# Altium PCB PCB1.PcbDoc
Units mm, origin at the board's own origin, x right, y up, seen from the top; angles counter-clockwise.
Board outline 102.49 x 44.58 mm, 2 copper layers (Top Layer, Bottom Layer); 31 components, 40 nets, 125 pads, 4 vias.
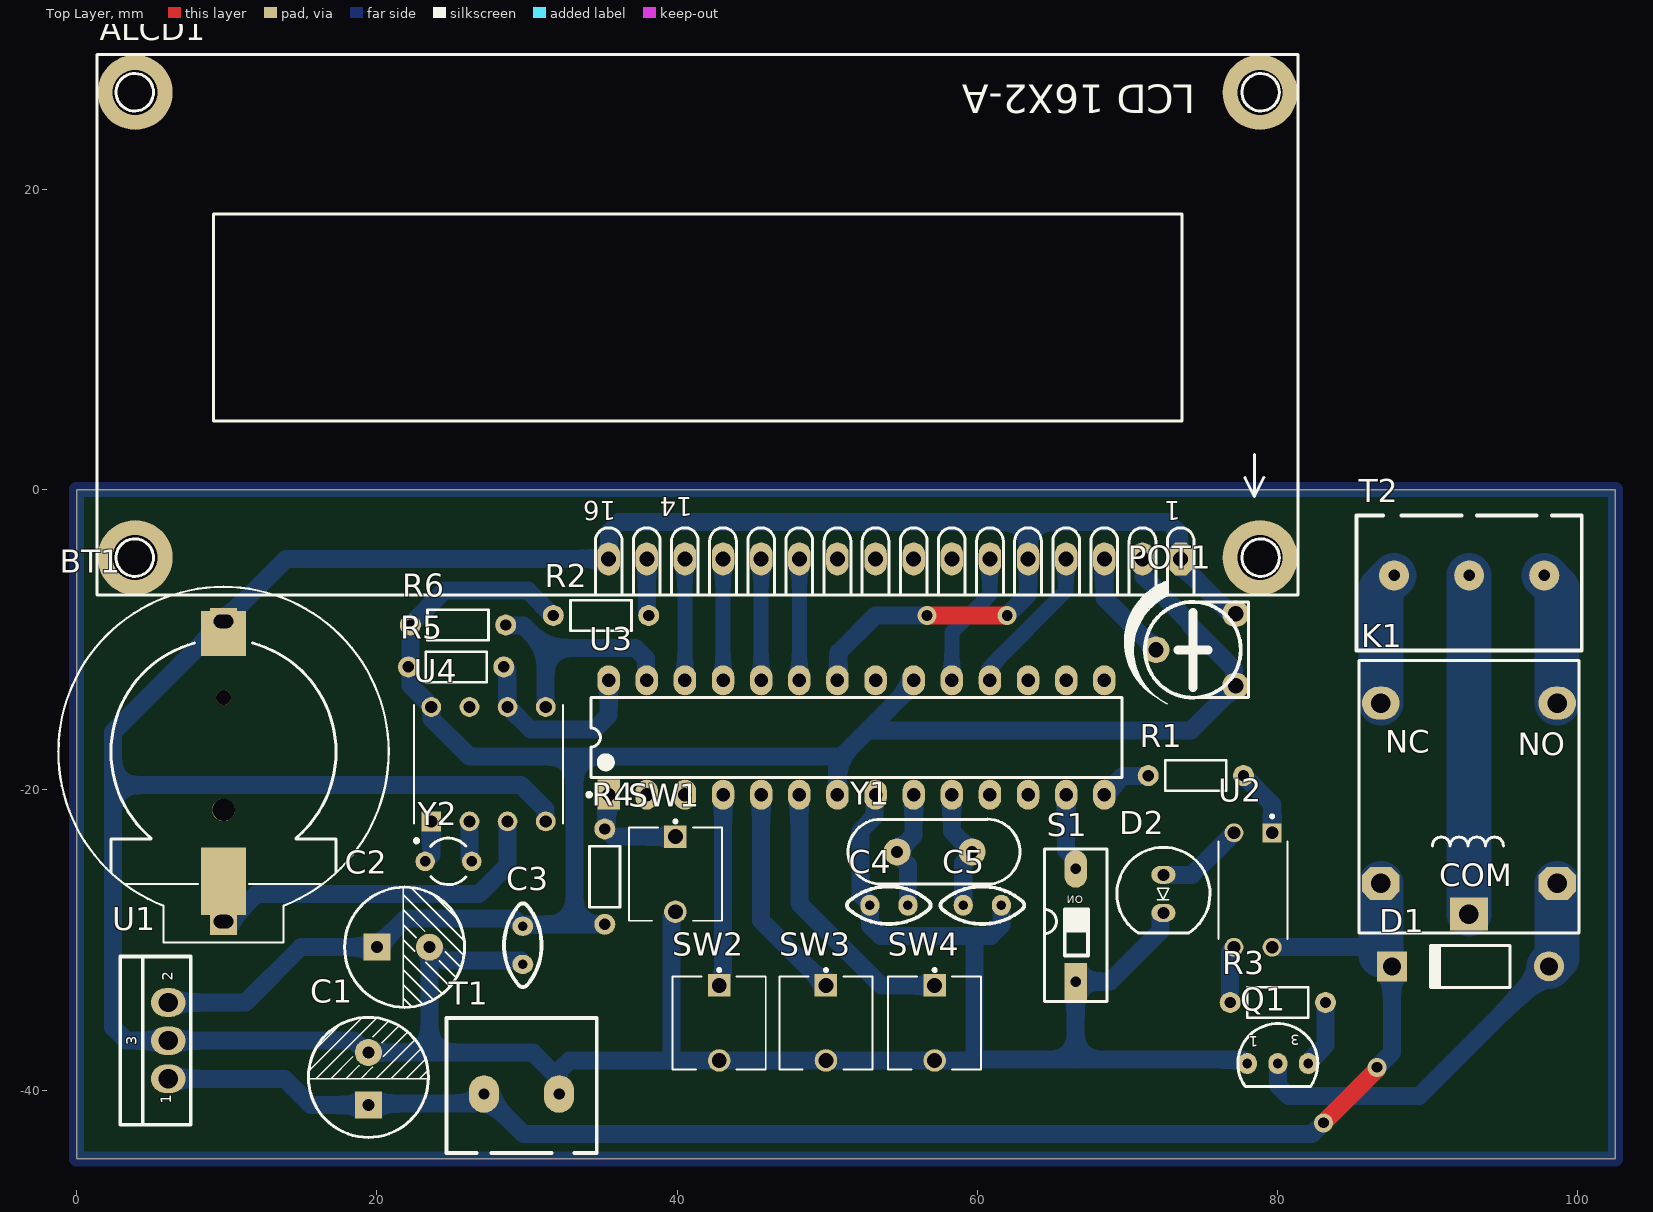
[diagram p0: Top Layer view]
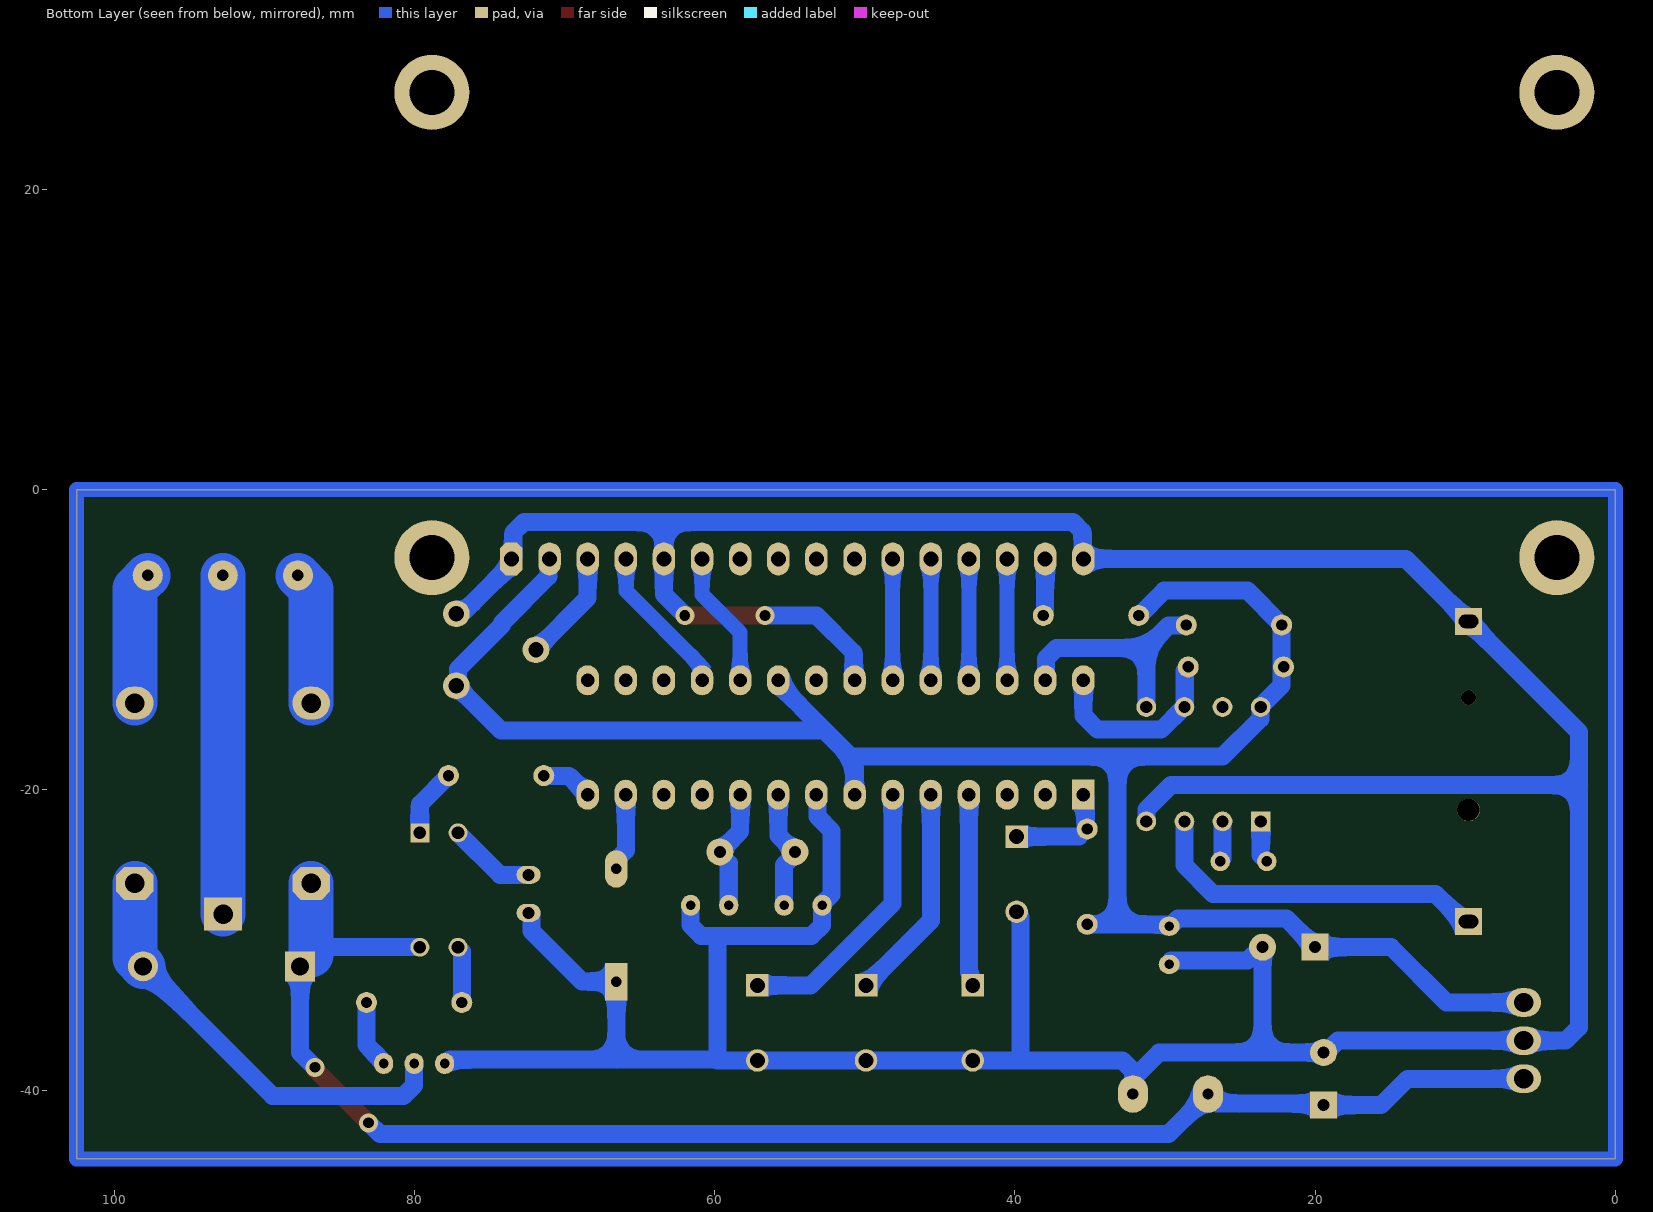
[diagram p1: Bottom Layer view, seen from below]
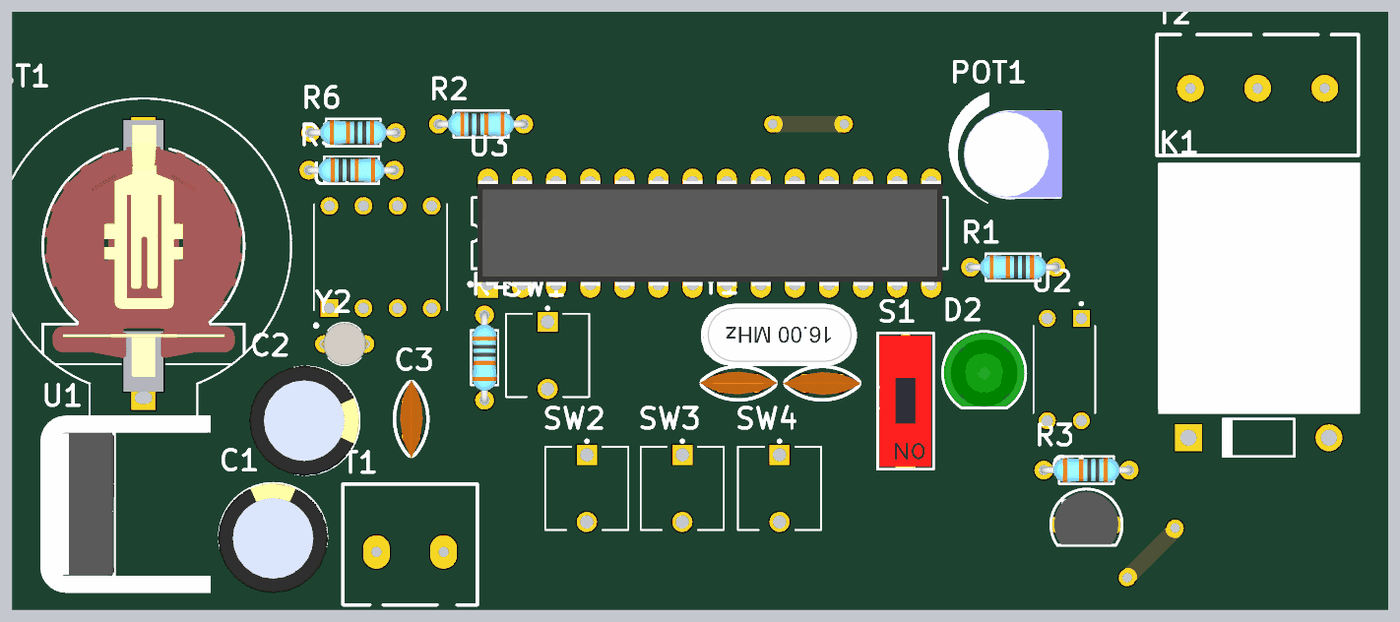
[diagram p2: 3D render of the assembled board from above, using the file's embedded part models]

## Layer stack, top to bottom
Top Solder: solder mask 0.0102, Solder Resist, Dk 3.5
Top Layer: signal copper 0.0356
Dielectric 1: dielectric 0.32, FR-4, Dk 4.8
Bottom Layer: signal copper 0.0356
Bottom Solder: solder mask 0.0102, Solder Resist, Dk 3.5

## Board outline
0,-44.577 0,0 102.489,0 102.489,-44.577

## Design rules (kind name [scope] priority, off if disabled: settings)
Clearance [All] p1: gap=0.254 ignorepadtopadclearanceinfootprint=FALSE except(0: Arc-Hole Track-Hole SMDPad-Hole THPad-Hole Via-Hole Fill-Hole Poly-Hole Region-Hole Text-Hole)
PolygonConnect [All] p1: connectstyle=Relief reliefconductorwidth=0.254 reliefentries=4 polygonreliefangle="90 Angle" airgapwidth=0.254
RoutingVias [All] p1: holewidth=0.711 width=1.27 viastyle="Through Hole" minholewidth=0.711 minwidth=1.27 maxholewidth=0.711 maxwidth=1.27
SolderMaskExpansion [All] p1: expansion=0.102 istentingtop=FALSE
Width [All] p1: maxlimit=3 minlimit=1 preferedwidth=1.2
30 further rules are at their usual default settings.

## Classes and differential pairs
component class Sheet1: ALCD1 BT1 C1 C2 C3 C4 C5 D1 D2 K1 POT1 Q1 R1 R2 R3 R4 S1 SW1 SW2 SW3 SW4 T1 T2 U1 U2 U3 U4 Y1 Y2

## Components (designator, comment, footprint, x,y, rotation, side; value= is the part's Value field where it differs from the comment)
ALCD1 "LCD" LCD_2X16 44.069,11.684 r180 top
BT1 "BAT3V3" BTH1220 9.779,-18.773 r90 top
C1 "100uf" "Cap electrolitic radial 8x14-3.5" 19.431,-39.243 r90 top value=1uF
C2 "100uf" "Cap electrolitic radial 8x14-3.5" 21.745,-30.48 r0 top value=1uF
C3 "100nF" Cap-100nF 29.718,-30.353 r90 top
C4 "22pf" Cap-100nF 54.102,-27.686 r180 top
C5 "22pf" Cap-100nF 60.325,-27.686 r0 top
D1 "Diode 1N4007" DO-41 92.837,-31.75 r180 top
D2 "LED 5MM" LED5MM_GRN 72.39,-26.924 r270 top
K1 "" "Relay 18.85x15.35x15.70" 92.743,-21.249 r0 top
POT1 "10K" "POT 4" 74.549,-10.668 r90 top
Q1 "C945" C945 80.01,-38.227 r180 top
R1 "1K" RES-(1/4) 74.549,-19.05 r180 top
R2 "220" RES-(1/4) 34.925,-8.382 r0 top
R3 "2.2K" RES-(1/4) 80.01,-34.163 r180 top
R4 "10K" RES-(1/4) 35.179,-25.781 r270 top
R5 "10K" RES-(1/4) 25.273,-11.811 r0 top
R6 "10K" RES-(1/4) 25.4,-9.017 r180 top
S1 "DS1" "DIP Switch x1" 66.548,-32.766 r0 top
SW1 "FSM8JRT" TE_FSM8JRT 39.878,-23.114 r270 top
SW2 "down" TE_FSM8JRT 42.799,-33.02 r270 top
SW3 "set" TE_FSM8JRT 49.911,-33.02 r270 top
SW4 "up" TE_FSM8JRT 57.15,-33.02 r270 top
T1 "Terminal" "Terminal 1*2" 24.638,-44.196 r0 top
T2 "Terminal" "Terminal 1*3" 100.257,-1.715 r180 top
U1 "L7805CV" 78XXCV 6.096,-36.703 r90 top
U2 "PC817X3NSZ1B" DIP762W50P254L495H455Q4 78.359,-26.67 r270 top
U3 "ATmega328A-PU" 28P3 51.943,-16.51 r90 top
U4 "DS1307N" DIP762W47P254L991H457Q8 27.432,-18.288 r90 top
Y1 "16 MHz" "XTAL 16MHZ" 57.15,-24.13 r180 top value="12 MHz"
Y2 "32.768KHz" "XTAL RTC" 24.765,-24.765 r180 top value="12 MHz"

## Footprints (in the part's own frame and the unit in brackets; to place one, negate y for a bottom-side part, rotate by r counter-clockwise, add the part's x,y. Pads: shape width x height; smd on the part's side, far side on the other; paste and mask are expansions set on the pad)
28P3 [mm] "DIP, 28-Leads, Row Spacing 7.62mm, Pitch 2.54mm, Body 34.67x7.3mm"
  rect 2x1.5 hole 0.9: 1(-3.81,16.51)
  oval 2x1.5 hole 0.9: 2(-3.81,13.97) 3(-3.81,11.43) 4(-3.81,8.89) 5(-3.81,6.35) 6(-3.81,3.81) 7(-3.81,1.27) 8(-3.81,-1.27) 9(-3.81,-3.81) 10(-3.81,-6.35) 11(-3.81,-8.89) 12(-3.81,-11.43) 13(-3.81,-13.97) 14(-3.81,-16.51) 15(3.81,-16.51) 16(3.81,-13.97) 17(3.81,-11.43) 18(3.81,-8.89) 19(3.81,-6.35) 20(3.81,-3.81) 21(3.81,-1.27) 22(3.81,1.27) 23(3.81,3.81) 24(3.81,6.35) 25(3.81,8.89) 26(3.81,11.43) 27(3.81,13.97) 28(3.81,16.51)
  silkscreen extent -3.93,-17.7 2.65,17.93, body extent -3.95,-17.35 3.95,17.3, height 5.04
78XXCV [mil]
  oval 75x90 hole 50: 1(-100,0) 2(100,0) 3(0,0)
  silkscreen extent -221,-59 221,126, body extent -260,-343 260,157, height 890
BTH1220 [mm] "COIN CELL BATTERY HOLDER 1220 12mm CR1220"
  round 1.5 hole 1.5 unplated: 0(-2.563,0)
  round 1 hole 1 unplated: 0(4.93,0)
  rect 1.8x1.8 hole 0.9 slot 1.3 at 90 deg: 1(-10,0) 2(10,0)
  rect 4.5x3 smd: 1(-7.3,0)
  rect 3x3 smd: 2(9.2,0)
  silkscreen extent -11.4,-11 12.3,11, body extent -8.46,-7.39 10.34,7.36, height 4.28
C945 [mil] "NPN Transistor"
  oval 50x55 hole 25: 1(80,0) 2(0,0) 3(-80,0)
  silkscreen extent -105,-105 105,61, body extent -94,-96 95,58, height 315
"Cap electrolitic radial 8x14-3.5" [mm] "Cap electrolitic radial 8x14-3.5-Design:Abbas Basereh"
  rect 1.8x1.8 hole 0.8: 1(-1.75,0)
  round 1.8 hole 0.8: 2(1.75,0)
  silkscreen extent -3.9,-4 4.1,4, body extent -4.1,-4.1 4.1,4.1, height 14.6
Cap-100nF [mil] "Bipolar Capacitor-Design:Ali Hafizi"
  oval 50x55 hole 25: 1(-50,0) 2(50,0)
  silkscreen extent -110,-49 110,49, body extent -115,-34 115,33, height 272
DIP762W47P254L991H457Q8 [mm]
  rect 1.318x1.318 hole 0.81: 1(-3.81,3.81)
  round 1.318 hole 0.81: 2(-3.81,1.27) 3(-3.81,-1.27) 4(-3.81,-3.81) 5(3.81,-3.81) 6(3.81,-1.27) 7(3.81,1.27) 8(3.81,3.81)
  silkscreen extent -5.22,-4.96 3.94,4.96
DIP762W50P254L495H455Q4 [mm]
  rect 1.26x1.26 hole 0.84: 1(-3.81,1.27)
  round 1.26 hole 0.84: 2(-3.81,-1.27) 3(3.81,-1.27) 4(3.81,1.27)
  silkscreen extent -5.01,-2.3 3.25,2.3
"DIP Switch x1" [mm] "Switch DIP 1 way flat slide Thru-Hole-Design:Ali Hafizi"
  rect 1.5x2.5 hole 0.7: 1(0,0)
  oval 1.5x2.5 hole 0.7: 2(0,7.5)
  silkscreen extent -2.09,-1.32 2.08,8.82, body extent -1.94,-1.11 1.89,8.64, height 7.33
DO-41 [mm] "Diode, Axial; Body 5.2 x 2.7 mm (LxDia. max), Lead Dia. 0.86 mm (max)"
  round 2 hole 1.2: 1(-5.23,0)
  rect 2x2 hole 1.2: 2(5.23,0)
  silkscreen extent -2.65,-1.4 2.75,1.4
LCD_2X16 [mm] "LCD 2x16 Alphanumberic-Designer Abbas Basereh"
  oct 1.5x2.2 hole 1: 1(-29.464,16.3)
  oval 1.5x2.2 hole 1: 2(-26.924,16.3) 3(-24.384,16.3) 4(-21.844,16.3) 5(-19.304,16.3) 6(-16.764,16.3) 7(-14.224,16.3) 8(-11.684,16.3) 9(-9.144,16.3) 10(-6.604,16.3) 11(-4.064,16.3) 12(-1.524,16.3) 13(1.016,16.3) 14(3.556,16.3) 15(6.096,16.3) 16(8.636,16.3)
  round 5 hole 3: ""(-34.756,-14.775) ""(-34.756,16.213) ""(40.174,-14.775) ""(40.174,16.213)
  silkscreen extent -37.3,-17.29 42.7,18.71, body extent -37.35,-17.4 42.8,18.8, height 21
LED5MM_GRN [mm] "LED 5MM THROUGH HOLE GREEN-Designer Abbas Basereh"
  oval 1.2x1.6 hole 0.8: 1(-1.27,0) 2(1.27,0)
  silkscreen extent -3.1,-3.1 2.6,3.1, body extent -3,-3 2.5,3, height 9.14
"POT 4" [mil] "Trimmer"
  round 70 hole 40: 1(-94.49,-104.33) 2(94.49,-104.33) 3(0,104.33)
  silkscreen extent -141,-138 181,187, body extent -125,-144 127,145, height 187
"Relay 18.85x15.35x15.70" [mm]
  rect 2.5x2.2 hole 1.3: 1(0,-7.025)
  oval 2.5x2.2 hole 1.3: 2(-5.875,7.025) 3(5.875,7.025)
  oct 2.5x2.2 hole 1.3: 4(-5.875,-4.975) 5(5.875,-4.975)
  silkscreen extent -7.32,-8.27 7.32,9.87, body extent -7.37,-8.71 7.63,9.98, height 15.7
RES-(1/4) [mil]
  round 55 hole 30: 1(-125,0) 2(125,0)
  silkscreen extent -80,-40 80,40, body extent -135,-36 135,36, height 115
TE_FSM8JRT [mil]
  rect 59x59 hole 39: 1(0,0)
  round 59 hole 39: 2(197,0)
  silkscreen extent -44,-122 221,122
"Terminal 1*2" [mil]
  oval 78.74x98.43 hole 30: 1(98.15,155) 2(295,155)
  silkscreen extent 0,0 394,354
"Terminal 1*3" [mm]
  round 2 hole 0.762: 1(2.5,4) 2(7.5,4) 3(12.5,4)
  silkscreen extent 0,0 15,9
"XTAL 16MHZ" [mm] "Crystal Oscillator"
  round 1.8 hole 0.8: 1(-2.5,0) 2(2.5,0)
  silkscreen extent -5.67,-2.18 5.76,2.15, body extent -5.68,-2.38 5.67,2.27, height 0.99
"XTAL RTC" [mm] "Crystal Oscillator"
  round 1.3 hole 0.7: 1(-1.55,0) 2(1.55,0)
  silkscreen extent -1.17,-1.55 1.19,1.55, body extent -1.73,-1.6 1.72,1.6, height 8.98

## Part data
ALCD1: "Alphanumic LCD", Data=16-12-2016, Designer="Abbas Basereh"
BT1: library part "Battry Backup", "Battry Backup", Data=16-12-2016, Designer="Abbas Basereh"
C1 C2: library part "Cap ELECTROLITIC TOTAL SIZE", "Cap electrolitic radial", Data=16-12-2016, Designer="Abbas Basereh"
C3 C4 C5: library part "CAP CERAMIC TOTAL SIZE", "CAP Ceramic Total", Designer="Ali Hafizi"
D1: "1 Amp General Purpose Rectifier", Code_JEDEC=DO-204-AL, ComponentLink1Description="Manufacturer Link", ComponentLink1URL=http://www.fairchildsemi.com/, ComponentLink2Description=Datasheet, ComponentLink2URL=http://www.fairchildsemi.com/ds/1N%2F1N4001.pdf, DatasheetVersion=1998, LatestRevisionDate=17-Jul-2002, LatestRevisionNote="Re-released for DXP Platform.", PackageDescription="Diode, Axial; Body 5.2 x 2.7 mm (LxDia. max), Lead Dia. 0.86 mm (max)", PackageReference=DO-41, PackageVersion=Aug-1999, Published=8-Jun-2000, Publisher="Altium Limited"
D2: "Light Emitting Diode", Data=16-12-2016, Designer="Abbas Basereh"
K1: library part RELAY_SPDT, "Single-Pole Dual-Throw Relay", ComponentLink1Description=Datasheet, Designer="Abbas Basereh", Mounting Technology=Through-Hole, Pin Count=0, Update Date=2017-3-1
POT1: library part POT, "Variable Resistor"
Q1: "NPN Transistor", Company="IPA CO", Designer="Saeid Jorablo", Last Update Time=2008/08/04
R1 R2 R3 R4 R5 R6: library part "RES DIP PACKAGE", "TOTAL DIP RESISTOR PACK", Designer="Ali Hafizi"
S1: library part "DIP Switch 1", "1 BIT DIP Switch"
SW1: "Switch Tactile OFF _ON_ SPST Round Button PC Pins 0.05A 12VDC 1.57N Thru-Hole Radial Tape", Contact_Current_Rating="50 mA", Package=None, Availability=Unavailable, Configuration_Pole-Throw="Single Pole - Single Throw", EU_RoHS_Compliance=Compliant, MF="TE Connectivity", MP=FSM8JRT, Price=None, SnapEDA_Link=https://www.snapeda.com/parts/FSM8JRT/TE%20Connectivity%20ALCOSWITCH%20Switches/view-part/226999/?ref=snap, TE_purchase_URL=https://www.te.com/usa-en/product-147694-1.html?te_bu=Cor&te_type=disp&te_campaign=seda_glo_cor-seda-global-disp-prtnr-fy19-seda-model-bom-cta_sma-317_1&elqCampaignId=32493
SW2 SW3 SW4: library part FSM8JRT, "Switch Tactile OFF _ON_ SPST Round Button PC Pins 0.05A 12VDC 1.57N Thru-Hole Radial Tape", Contact_Current_Rating="50 mA", Package=None, Availability=Unavailable, Configuration_Pole-Throw="Single Pole - Single Throw", EU_RoHS_Compliance=Compliant, MF="TE Connectivity", MP=FSM8JRT, Price=None, SnapEDA_Link=https://www.snapeda.com/parts/FSM8JRT/TE%20Connectivity%20ALCOSWITCH%20Switches/view-part/226999/?ref=snap, TE_purchase_URL=https://www.te.com/usa-en/product-147694-1.html?te_bu=Cor&te_type=disp&te_campaign=seda_glo_cor-seda-global-disp-prtnr-fy19-seda-model-bom-cta_sma-317_1&elqCampaignId=32493
T1: library part "Terminal 1*2", "Terminal 2 Pin 250VAC 16A", ComponentLinkURL=www.picpars.com, Designer="Seyed Mohsen Ghasemain", E-mail=picpars@gmail.com
T2: library part "Terminal 1*3", "Terminal 3 Pin 250VAC 16A", ComponentLinkURL=www.picpars.com, Designer="Seyed Mohsen Ghasemain", E-mail=picpars@gmail.com
U1: library part L78XXCV, "Fixed Voltage Regulator", Adding Date=1387/01/06, Company=ControTec, Designer="Saeid Jorablo"
U2: "Optoisolator Transistor Output 1 Channel 4-DIP", Package=None, Availability=Good, Check_prices=https://www.snapeda.com/parts/PC817X3NSZ1B/Sharp%20Microelectronics/view-part/5163575/?ref=eda, MF="Sharp Microelectronics", MP=PC817X3NSZ1B, Price=None, Purchase-URL=https://pricing.snapeda.com/search/part/PC817X3NSZ1B/?ref=eda, SnapEDA_Link=https://www.snapeda.com/parts/PC817X3NSZ1B/Sharp%20Microelectronics/view-part/5163575/?ref=snap
U3: library part ATmega8A-PU, "8-bit AVR Microcontroller, 8KB Flash, 512 Bytes EEPROM, 1KB SRAM, 28-pin PDIP, Industrial Grade (-40°C to 85°C)", Supplier Part Number 1=ATMEGA8A-PU-ND, ComponentLink1Description="Manufacturer Link", ComponentLink1URL=http://www.atmel.com/products/avr/default.asp?, ComponentLink2Description="ATmega8A Datasheet", ComponentLink2URL=http://www.atmel.com/dyn/resources/prod_documents/doc8159.pdf, ComponentLink3Description="ATmega8A Summary", ComponentLink3URL=http://www.atmel.com/dyn/resources/prod_documents/8159S.pdf, ComponentLink4Description="Atmel.com Home", ComponentLink4URL=http://www.atmel.com, DatasheetVersion=2017-1-5, PackageDescription="28-lead (0.300\"/7.62mm Wide) Plastic Dual Inline Package (PDIP)", PackageReference=28P3, PackageVersion=2017-1-5, Published=2017-1-5, Publisher="Abbas Basereh", Supplier 1=Digi-Key, Supplier 2=Farnell, Supplier 3=Mouser, Supplier Part Number 2=1748534, Supplier Part Number 3=556-ATMEGA8A-PU
U4: "Real Time Clock _RTC_ IC Clock/Calendar 56B IÂ²C, 2-Wire Serial 8-DIP _0.300, 7.62mm_", Package="DIP-8 Maxim Integrated", Availability=Unavailable, MF="Maxim Integrated", MP=DS1307N, Price=None, SnapEDA_Link=https://www.snapeda.com/parts/DS1307N/Maxim%20Integrated/view-part/9754/?ref=snap
Y1 Y2: library part XTAL, "XTAL Crystal", ComponentLink1Description=Datasheet, ComponentLink2Description=Reference, Design Date=2017-1-3, Designer="ABBAS BASEREH", Mounting Technology="Surface Mount\Through-Hole", Status=Unreleased

## Via types
v1: diameter 1.27, hole 0.711, Top Layer to Bottom Layer, 4 vias

## Nets (pads, with @x,y where several pads share a name; then routed paths per layer and width w, separated by ;. In a path a pad name is that pad's centre, name@x,y a point inside that pad or via, vN(x,y) a via of type N, cw(c..) or ccw(c..) an arc to the next point about the centre after c; other vN are vias at no path point)
+5: ALCD1.2 C2.1 C3.2 POT1.1 R2.1 R4.2 R5.1 R6.2 U1.2 U3.7 U3.20 U4.8 | length 135.5
  Bottom Layer w1.2: U1.2 11.245,-34.163 14.928,-30.48 C2.1 21.9,-28.575 29.128,-28.575 C3.2@29.636,-29.083 ; C3.2 29.8,-29.083 29.927,-28.956 33.147,-28.956 ; R2.1 31.697,-8.382 30.046,-6.731 24.511,-6.731 R6.2 22.225,-13.049 23.622,-14.446 U4.8 23.645,-14.501 23.645,-15.263 26.162,-17.78 33.147,-17.78 ; R4.2 33.147,-28.956 ; U3.7 50.673,-18.03 ; U3.20 55.753,-12.95 52.766,-15.937 ; ALCD1.2 71.05,-4.673 71.05,-5.772 74.168,-8.89 74.168,-9.017 77.088,-11.937 77.088,-12.957 POT1.1 74.234,-16.033 52.863,-16.033 52.766,-15.937 ; 33.147,-28.956 33.147,-17.78 ; 33.147,-17.78 50.673,-17.78 50.673,-18.03 ; 50.673,-18.03 52.766,-15.937
+12: C1.1 D1.2 K1.4 T1.1 U1.1 U2.4 | length 103.1
  Top Layer w1.2: v1(83.046,-42.176) 86.601,-38.621 86.601,-38.494 v1(86.614,-38.481)
  Bottom Layer w1.2: U1.1 13.843,-39.243 15.593,-40.993 C1.1 19.53,-40.894 T1.1@26.53,-40.894 ; T1.1 27.131,-40.293 29.764,-42.926 82.296,-42.926 v1(83.046,-42.176) ; U2.4 86.337,-30.48 D1.2@86.868,-31.011 ; v1(86.614,-38.481) 87.607,-37.488 D1.2
  Bottom Layer w3: D1.2@86.868,-31.011 K1.4
GND: ALCD1.1 ALCD1.5 ALCD1.16 BT1.2 C1.2 C2.2 C3.1 C4.2 C5.2 D2.2 POT1.2 Q1.1 S1.1 SW1.2 SW2.2 SW3.2 SW4.2 T1.2 U1.3 U3.8 U3.22 U4.4 | length 304.2
  Top Layer w1.2: v1(56.642,-8.382) v1(61.976,-8.382)
  Bottom Layer w1.2: BT1.2@9.779,-8.773 2.413,-16.139 2.413,-19.685 ; BT1.2@9.916,-8.636 10.079,-8.473 13.936,-4.616 ALCD1.16 35.49,-4.559 35.49,-2.805 36.136,-2.159 63.373,-2.159 ; C1.2 23.495,-37.493 ; C3.1@29.533,-31.438 29.601,-31.369 24.498,-31.369 23.609,-30.48 C2.2 23.495,-37.493 ; U4.4 31.219,-22.075 31.219,-21.313 29.591,-19.685 2.413,-19.685 ; 31.861,-38.973 30.381,-37.493 23.495,-37.493 ; T1.2 32.131,-38.727 32.834,-38.024 39.821,-38.024 SW2.2 SW3.2 SW4.2 59.817,-38.024 ; 39.624,-38.024 39.624,-28.453 39.878,-28.199 SW1.2 ; U3.22 50.73,-12.643 50.73,-10.865 53.213,-8.382 v1(56.642,-8.382) ; U3.8 53.156,-20.377 53.156,-21.774 52.197,-22.733 52.197,-26.969 52.832,-27.604 C4.2 52.845,-27.699 52.845,-29.028 53.535,-29.718 59.817,-29.718 ; C5.2 61.595,-29.015 60.892,-29.718 59.817,-29.718 ; v1(61.976,-8.382) 63.373,-6.985 ALCD1.5 63.373,-2.159 ; D2.2 72.19,-28.194 72.19,-29.41 68.834,-32.766 S1.1 66.548,-37.973 ; POT1.2 77.088,-8.157 76.724,-8.157 73.533,-4.966 ALCD1.1 73.407,-4.49 73.407,-2.862 72.704,-2.159 63.373,-2.159 ; Q1.1 77.978,-38.182 77.946,-38.15 77.788,-38.15 77.611,-37.973 66.548,-37.973 ; 2.413,-19.685 2.413,-35.814 3.302,-36.703 U1.3 18.479,-36.703 19.269,-37.493 23.495,-37.493 ; 59.817,-29.718 59.817,-37.973 66.548,-37.973
NetALCD1_3: ALCD1.3 POT1.3 | length 7.5
  Bottom Layer w1.2: ALCD1.3 68.453,-7.222 POT1.3
NetALCD1_4: ALCD1.4 U3.18 | length 10.2
  Bottom Layer w1: U3.18 60.929,-12.604 60.929,-11.715 65.887,-6.757 65.887,-4.642 ALCD1.4
NetALCD1_6: ALCD1.6 U3.19 | length 9.1
  Bottom Layer w1: U3.19 58.293,-9.525 60.833,-6.985 ALCD1.6
NetALCD1_11: ALCD1.11 U3.23 | length 8.1
  Bottom Layer w1: U3.23 ALCD1.11
NetALCD1_12: ALCD1.12 U3.24 | length 8.1
  Bottom Layer w1: U3.24 ALCD1.12
NetALCD1_13: ALCD1.13 U3.25 | length 8.1
  Bottom Layer w1: U3.25 ALCD1.13
NetALCD1_14: ALCD1.14 U3.26 | length 8.1
  Bottom Layer w1: U3.26 ALCD1.14
NetALCD1_15: ALCD1.15 R2.2 | length 3.8
  Bottom Layer w1.2: ALCD1.15 37.973,-8.202 38.1,-8.329 R2.2
NetBT1_1: BT1.1 U4.3 | length 23.4
  Bottom Layer w1.2: BT1.1@9.779,-28.773 10.079,-28.473 10.425,-28.473 11.973,-26.924 26.797,-26.924 28.702,-25.019 U4.3
NetC4_1: C4.1 U3.9 Y1.2 | length 8.1
  Bottom Layer w1.2: C4.1@55.372,-27.702 55.372,-25.014 54.65,-24.292 Y1.2 55.753,-23.027 U3.9
NetC5_1: C5.1 U3.10 Y1.1 | length 8.2
  Bottom Layer w1.2: U3.10 58.293,-22.773 Y1.1 59.65,-24.292 59.055,-24.887 C5.1
NetD1_1: D1.1 K1.5 Q1.2 | length 29.1
  Bottom Layer w1.2: Q1.2 80.023,-38.24 80.023,-39.683 80.726,-40.386 89.431,-40.386 D1.1
  Bottom Layer w3: D1.1 98.618,-31.199 K1.5
NetD2_1: D2.1 U2.2 | length 5.9
  Bottom Layer w1.2: D2.1 74.295,-25.654 U2.2
NetK1_1: K1.1 T2.2 | length 22.6
  Bottom Layer w3: K1.1 92.743,-5.729 T2.2
NetK1_2: K1.2 T2.3 | length 8.9
  Bottom Layer w3: K1.2 86.868,-6.604 T2.3
NetK1_3: K1.3 T2.1 | length 8.9
  Bottom Layer w3: T2.1 98.618,-6.576 K1.3
NetP1_1: U3.3
NetP1_2: U3.2
NetQ1_3: Q1.3 R3.1 | length 4.5
  Bottom Layer w1.2: Q1.3 82.042,-38.145 83.185,-37.002 R3.1
NetR1_1: R1.1 U2.1 | length 4.6
  Bottom Layer w1.2: R1.1 79.629,-20.955 U2.1
NetR1_2: R1.2 U3.14 | length 3.5
  Bottom Layer w1.2: U3.14 68.453,-20.151 68.592,-20.013 68.76,-20.013 69.685,-19.088 71.336,-19.088 R1.2
NetR3_2: R3.2 U2.3 | length 3.8
  Bottom Layer w1.2: R3.2 76.835,-30.75 77.089,-30.496 U2.3
NetR4_1: R4.1 SW1.1 U3.1 | length 6.5
  Bottom Layer w1.2: R4.1 35.179,-22.553 35.283,-22.449 35.283,-20.47 U3.1 ; 35.74,-23.114 SW1.1
NetR5_2: R5.2 U3.28 U4.6 | length 12.9
  Bottom Layer w1.2: R5.2 28.448,-11.864 28.679,-12.096 28.679,-14.455 28.725,-14.501 28.757,-14.501 30.247,-15.991 34.487,-15.991 35.433,-15.045 U3.28
NetR6_1: R6.1 U3.27 U4.5 | length 15.7
  Bottom Layer w1.2: R6.1 28.613,-9.055 29.756,-9.055 31.242,-10.541 ; U4.5 31.242,-10.541 ; U3.27 37.916,-12.643 37.916,-11.244 37.213,-10.541 31.242,-10.541
NetS1_2: S1.2 U3.13 | length 5.2
  Bottom Layer w1.2: U3.13 65.913,-24.05 66.548,-24.685 S1.2
NetSW2_1: SW2.1 U3.4 | length 12.8
  Bottom Layer w1.2: SW2.1 42.948,-32.871 42.948,-32.272 43.053,-32.168 U3.4
NetSW3_1: SW3.1 U3.5 | length 14.5
  Bottom Layer w1.2: U3.5 45.593,-28.702 SW3.1
NetSW4_1: SW4.1 U3.6 | length 18.5
  Bottom Layer w1.2: U3.6 48.133,-27.559 53.594,-33.02 SW4.1
NetU3_11: U3.11
NetU3_12: U3.12
NetU3_15: U3.15
NetU3_16: U3.16
NetU3_17: U3.17
NetU4_1: U4.1 Y2.2 | length 2.8
  Bottom Layer w1.2: Y2.2 23.215,-24.738 23.622,-24.331 U4.1
NetU4_2: U4.2 Y2.1 | length 2.7
  Bottom Layer w1.2: U4.2 26.162,-24.585 26.315,-24.738 Y2.1
NetU4_7: U4.7
pads on no net: ALCD1. ALCD1.7 ALCD1.8 ALCD1.9 ALCD1.10 BT1.0 U3.21
copper on no net: | length 294.1
  Bottom Layer w1: 0,-44.577 102.489,-44.577 102.489,0 0,0 0,-44.577

## Text inside footprints (layer, text, board x,y; h text height)
ALCD1: Top Overlay "14" at 41.021,-0.508 h1.27 r180; Top Overlay "1" at 73.533,-0.762 h1.27 r180; Top Overlay "16" at 35.941,-0.762 h1.27 r180; Top Overlay "LCD 16X2-A" at 74.507,26.967 h1.91 r180
K1: Top Overlay "COM" at 90.762,-26.431 h1.5; Top Overlay "NO" at 95.994,-17.693 h1.5; Top Overlay "NC" at 87.155,-17.515 h1.5
Q1: Top Overlay "1" at 78.715,-36.417 h0.7 r180; Top Overlay "3" at 81.483,-36.322 h0.7 r180
S1: Top Overlay "ON" at 67.048,-27.566 h0.5
U1: Top Overlay "3" at 3.996,-37.003 h0.7 r90; Top Overlay "2" at 6.396,-32.703 h0.7 r90; Top Overlay "1" at 6.296,-40.903 h0.7 r90